# Altium PCB PCB1.PcbDoc
Units mil, origin at the board's own origin, x right, y up, seen from the top; angles counter-clockwise.
Board outline 2240 x 3040 mil, 2 copper layers (Top Layer, Bottom Layer); 15 components, 12 nets, 105 pads, 0 vias.
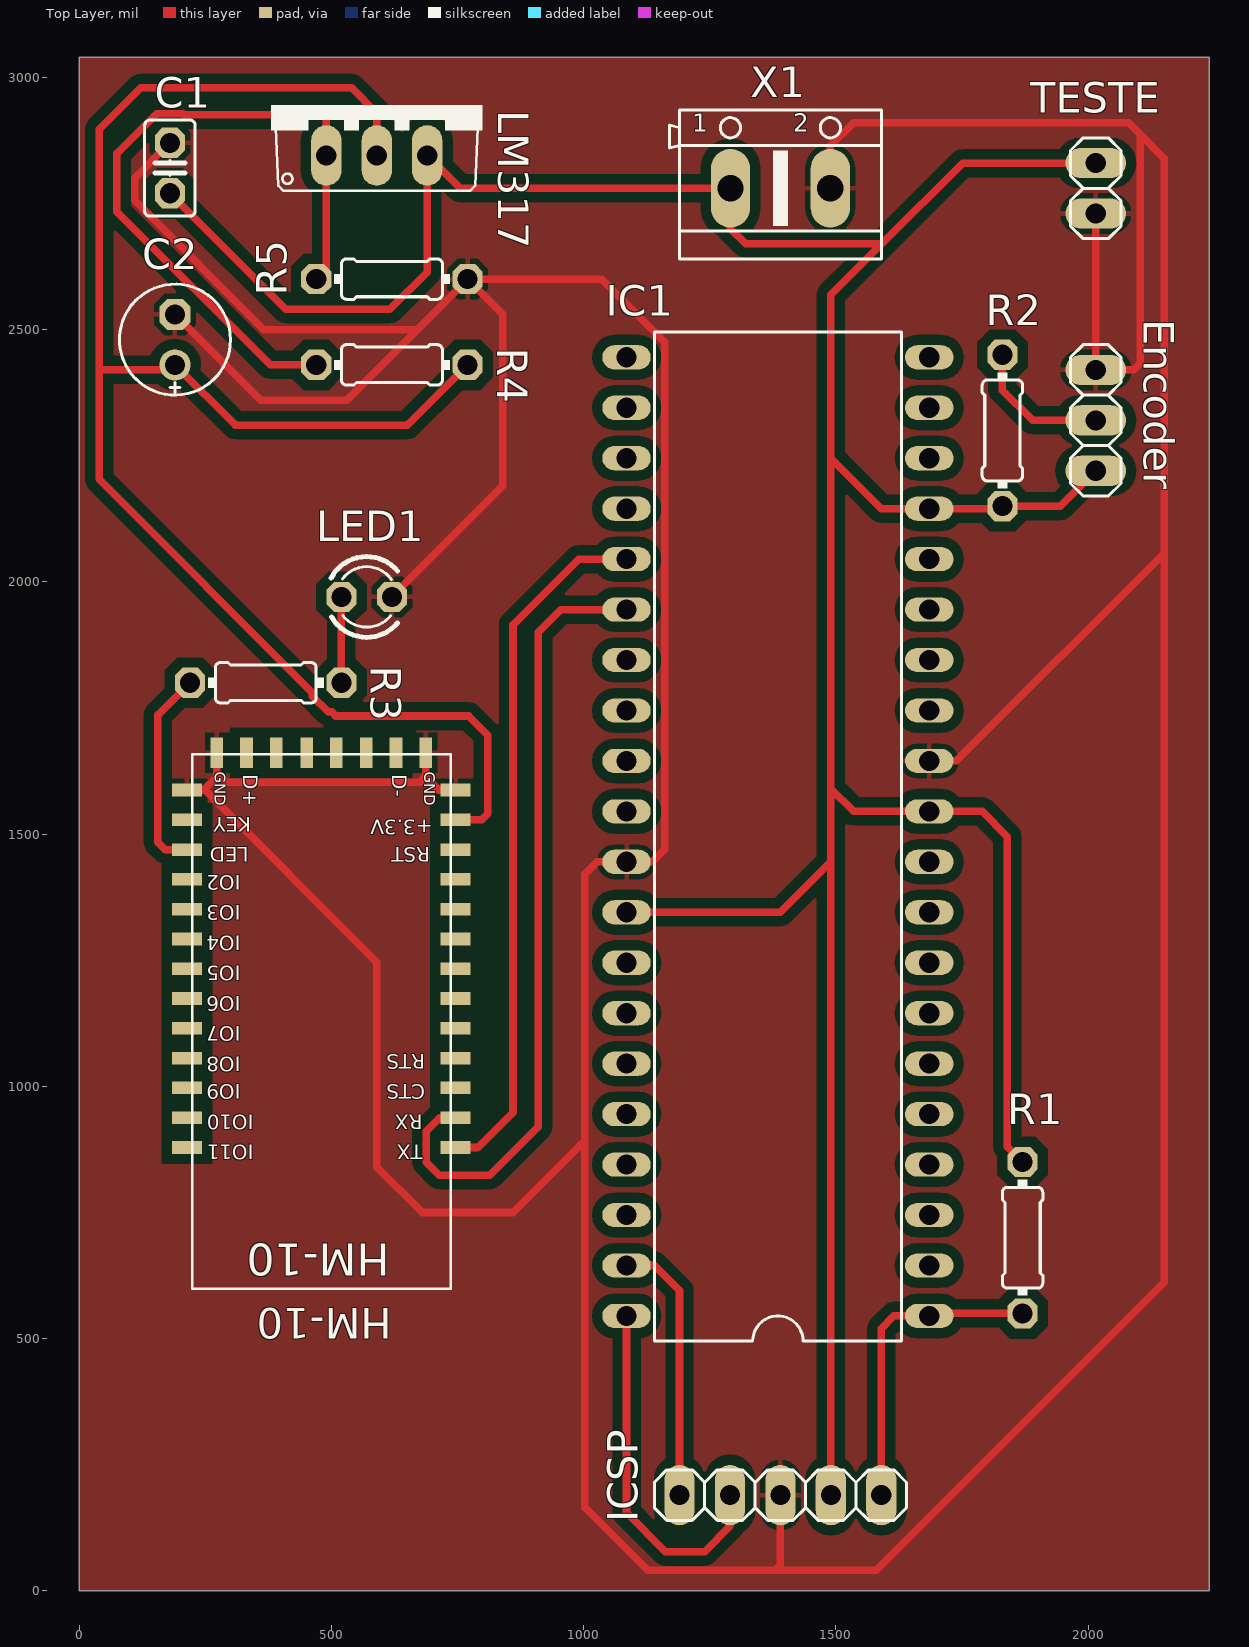
[diagram p0: Top Layer view]
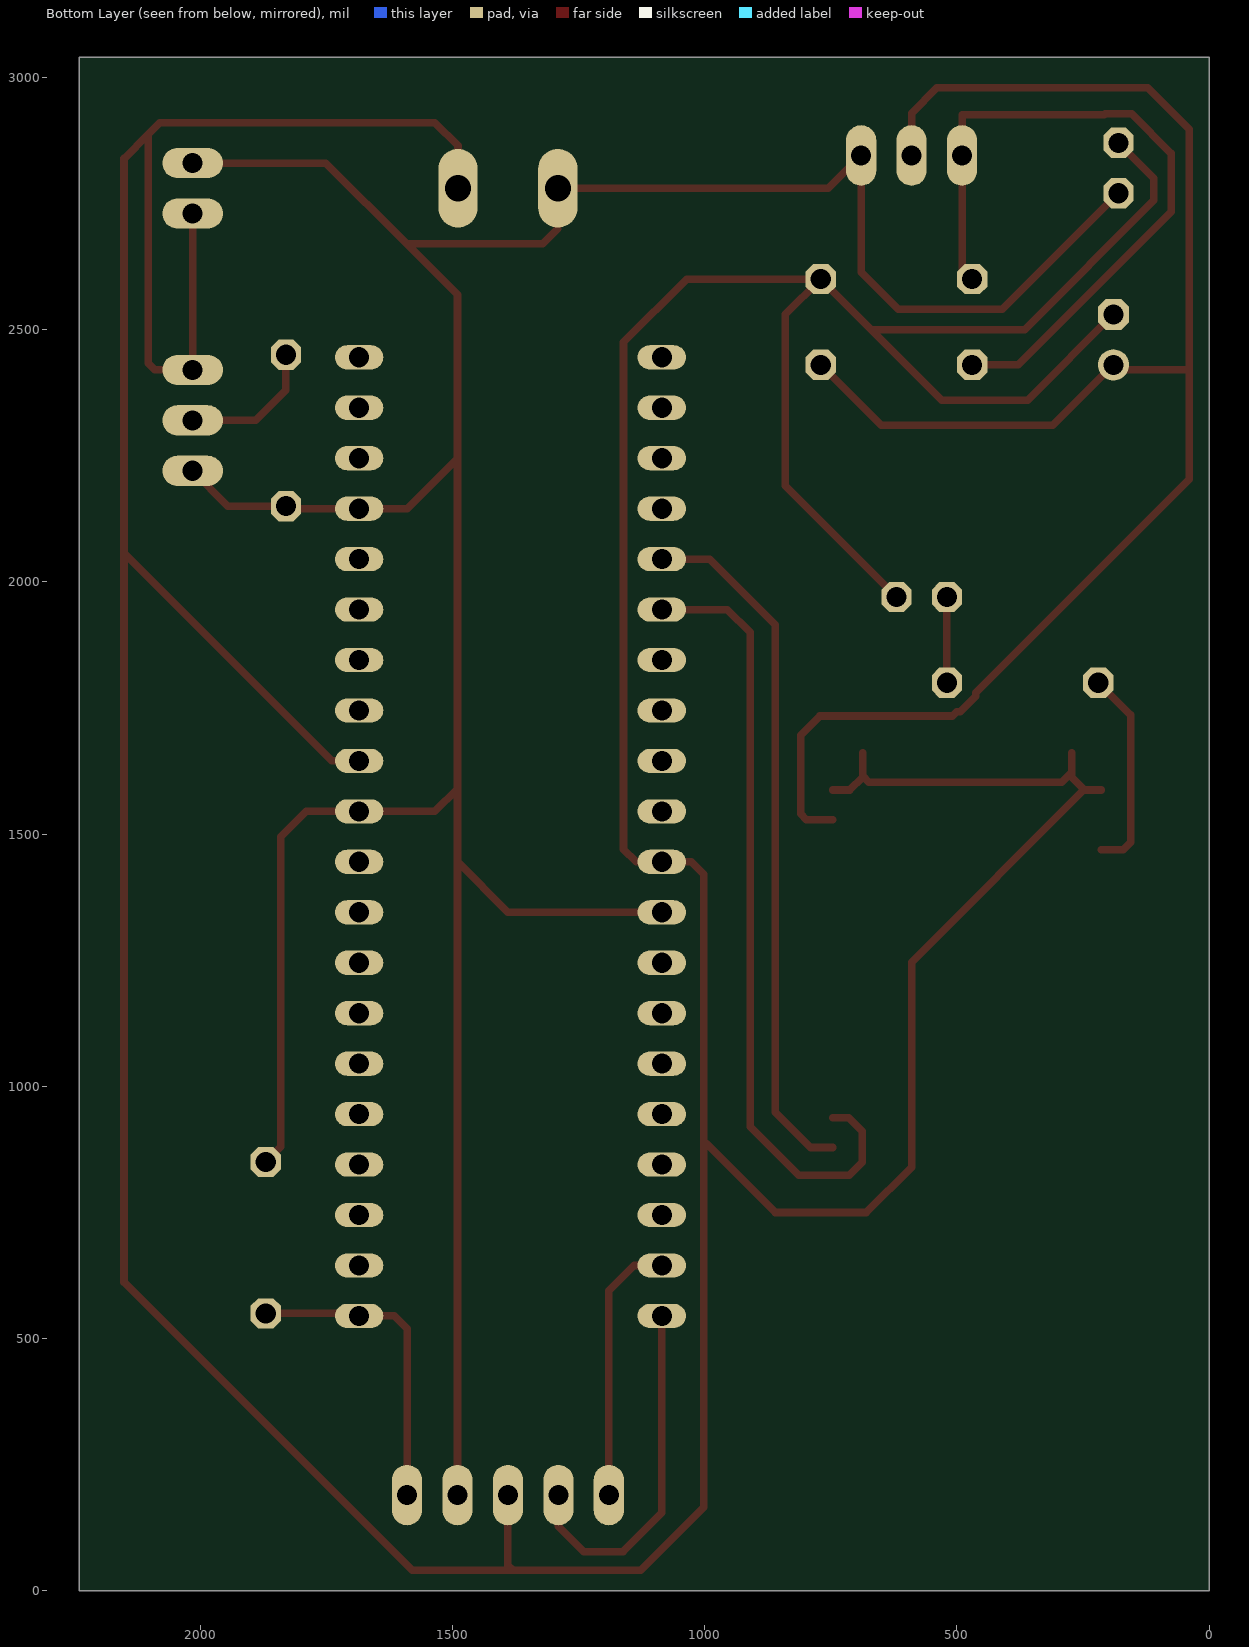
[diagram p1: Bottom Layer view, seen from below]

## Layer stack, top to bottom
Top Solder: solder mask 0.4, Solder Resist, Dk 3.5
Top Layer: signal copper 1.4
Dielectric 1: dielectric 12.6, FR-4, Dk 4.8
Bottom Layer: signal copper 1.4
Bottom Solder: solder mask 0.4, Solder Resist, Dk 3.5

## Board outline
0,0 0,3040 2240,3040 2240,0

## Design rules (kind name [scope] priority, off if disabled: settings)
Clearance [All] p1: gap=20
PolygonConnect [All] p1: connectstyle=Relief reliefconductorwidth=10 reliefentries=4 polygonreliefangle="90 Angle" airgapwidth=10
RoutingLayers [All] p1: top layer_v5=TRUE bottom layer_v5=FALSE
RoutingVias [All] p1: holewidth=28 width=50 viastyle="Through Hole" minholewidth=28 minwidth=50 maxholewidth=28 maxwidth=50
SolderMaskExpansion [All] p1: expansion=4
UnpouredPolygon [All] p1: allowunpoured=FALSE
Width [All] p1: maxlimit=20 minlimit=15 preferedwidth=15
28 further rules are at their usual default settings.

## Components (designator, comment, footprint, x,y, rotation, side; value= is the part's Value field where it differs from the comment)
C1 "100nF" C025-025X050 180,2820 r90 top
C2 "1uF" E2,5-6E 190,2480 r90 top
Encoder "PIN HEADER" 1X03 2015,2320 r90 top
HM-10 "HM Bluetooth module use TI CC2540 or CC2541, Master and slave roles in one, transmission version and remote control version and PIO state acquisition functions in one, Support the AT command modify module parameters, Convenient and flexible." HM-10_BOARD 480,1270 r180 top
IC1 "PIC18F4550" DIL40 1385,1495 r90 top
ICSP "PIN HEADER" 1X05 1390,190 r180 top
LED1 "LED   OSRAM: - CHIPLED LG R971, LG N971, LY N971, LG Q971, LY Q971, LO R971, LY R971 LH N974, LH R974 LS Q976, LO Q976, LY Q976 LO Q996 - Hyper CHIPLED LW Q18S LB Q993, LB Q99A, LB R99A - SideLED LS A670, LO A670, LY A670, LG A670, LP A670 LB A673, LV A673, LT A673, LW A673 LH A674 LY A675 LS A676, LA A676, LO A676, LY A676, LW A676 LS A679, LY A679, LG A679 -  Hyper Micro SIDELED® LS Y876, LA Y876, LO Y876, LY Y876 LT Y87S - SmartLED LW L88C, LW L88S LB L89C, LB L89S, LG L890 LS L89K, LO L89K, LY L89K LS L896, LA L896, LO L896, LY L896 - TOPLED LS T670, LO T670, LY T670, LG T670, LP T670 LSG T670, LSP T670, LSY T670, LOP T670, LYG T670 LG T671, LOG T671, LSG T671 LB T673, LV T673, LT T673, LW T673 LH T674 LS T676, LA T676, LO T676, LY T676, LB T676, LH T676, LSB T676, LW T676 LB T67C, LV T67C, LT T67C, LS T67K, LO T67K, LY T67K, LW E67C LS E67B, LA E67B, LO E67B, LY E67B, LB E67C, LV E67C, LT E67C LW T67C LS T679, LY T679, LG T679 LS T770, LO T770, LY T770, LG T770, LP T770 LB T773, LV T773, LT T773, LW T773 LH T774 LS E675, LA E675, LY E675, LS T675 LS T776, LA T776, LO T776, LY T776, LB T776 LHGB T686 LT T68C, LB T68C - Hyper Mini TOPLED® LB M676 - Mini TOPLED Santana® LG M470 LS M47K, LO M47K, LY M47K    Source: http://www.osram.convergy.de   LUXEON: - LUMILED® LXK2-PW12-R00, LXK2-PW12-S00, LXK2-PW14-U00, LXK2-PW14-V00 LXK2-PM12-R00, LXK2-PM12-S00, LXK2-PM14-U00 LXK2-PE12-Q00, LXK2-PE12-R00, LXK2-PE12-S00, LXK2-PE14-T00, LXK2-PE14-U00 LXK2-PB12-K00, LXK2-PB12-L00, LXK2-PB12-M00, LXK2-PB14-N00, LXK2-PB14-P00, LXK2-PB14-Q00 LXK2-PR12-L00, LXK2-PR12-M00, LXK2-PR14-Q00, LXK2-PR14-R00 LXK2-PD12-Q00, LXK2-PD12-R00, LXK2-PD12-S00 LXK2-PH12-R00, LXK2-PH12-S00 LXK2-PL12-P00, LXK2-PL12-Q00, LXK2-PL12-R00    Source: www.luxeon.com   KINGBRIGHT:   KA-3528ASYC Source: www.kingbright.com" LED3MM 570,1970 r0 top
LM317 "Positive VOLTAGE REGULATOR   Source: http://cache.national.com/ds/LM/LM78L05.pdf http://www.fairchildsemi.com/ds/LM/LM7805.pdf" TO220V 590,2945 r0 top
R1 "10k" 0204/7 1870,700 r270 top
R2 "10k" 0204/7 1830,2300 r90 top
R3 "330R" 0204/7 370,1800 r0 top
R4 "330R" 0204/7 620,2430 r0 top
R5 "330R" 0204/7 620,2600 r180 top
TESTE "PIN HEADER" 1X02 2015,2780 r270 top
X1 "CONNECTOR" AK500/2 1390,2780 r0 top

## Footprints (in the part's own frame and the unit in brackets; to place one, negate y for a bottom-side part, rotate by r counter-clockwise, add the part's x,y. Pads: shape width x height; smd on the part's side, far side on the other; paste and mask are expansions set on the pad)
1X02 [mil]
  oval 60x120 hole 40: 1(-50,0) 2(50,0)
  silkscreen extent -100,-50 100,50
1X03 [mil]
  oval 60x120 hole 40: 1(-100,0) 2(0,0) 3(100,0)
  silkscreen extent -150,-50 150,50
1X05 [mil]
  oval 60x120 hole 40: 1(-200,0) 2(-100,0) 3(0,0) 4(100,0) 5(200,0)
  silkscreen extent -250,-50 250,50
0204/7 [mil]
  oct 60x60 hole 40 mask+4: 1(-150,0) 2(150,0)
  silkscreen extent -115,-40 115,40
AK500/2 [mil]
  oval 78x156 hole 52: 1(-99,0) 2(99,0)
  silkscreen extent -220,-140 200,155
C025-025X050 [mil]
  oct 60x60 hole 40 mask+4: 1(-50,0) 2(50,0)
  silkscreen extent -95,-50 95,50
DIL40 [mil]
  oval 48x96 hole 40: 1(-950,-300) 2(-850,-300) 3(-750,-300) 4(-650,-300) 5(-550,-300) 6(-450,-300) 7(-350,-300) 8(-250,-300) 9(-150,-300) 10(-50,-300) 11(50,-300) 12(150,-300) 13(250,-300) 14(350,-300) 15(450,-300) 16(550,-300) 17(650,-300) 18(750,-300) 19(850,-300) 20(950,-300) 21(950,300) 22(850,300) 23(750,300) 24(650,300) 25(550,300) 26(450,300) 27(350,300) 28(250,300) 29(150,300) 30(50,300) 31(-50,300) 32(-150,300) 33(-250,300) 34(-350,300) 35(-450,300) 36(-550,300) 37(-650,300) 38(-750,300) 39(-850,300) 40(-950,300)
  silkscreen extent -1000,-245 1000,245
E2,5-6E [mil]
  round 62 hole 40: +(-50,0)
  oct 62x62 hole 40: -(50,0)
  silkscreen extent -110,-110 110,110
HM-10_BOARD [mil]
  rect 60x25 smd: 1(-266.14,391.24) 2(-266.14,332.19) 3(-266.14,273.13) 4(-266.14,214.08) 5(-266.14,155.02) 6(-266.14,95.97) 8(-266.14,-22.15) 9(-266.14,-81.2) 10(-266.14,-140.26) 11(-266.14,-199.31) 12(-266.14,-258.37) 13(-266.14,-317.42) 22(266.14,-317.42) 23(266.14,-258.37) 24(266.14,-199.31) 25(266.14,-140.26) 26(266.14,-81.2) 27(266.14,-22.15) 28(266.14,36.91) 29(266.14,95.97) 30(266.14,155.02) 31(266.14,214.08) 32(266.14,273.13) 33(266.14,332.19) 34(266.14,391.24) $7(-266.14,36.91)
  rect 25x60 smd: 14(-207.08,-391.24) 15(-148.03,-391.24) 16(-88.97,-391.24) 17(-29.92,-391.24) 18(29.14,-391.24) 19(89.14,-391.24) 20(148.14,-391.24) 21(207.14,-391.24)
  silkscreen extent -256,-388 256,671, body extent -256,-387 256,672, height 95
LED3MM [mil]
  oct 60x60 hole 40 mask+4: A(-50,0) K(50,0)
  silkscreen extent -71,-80 61,80
TO220V [mil]
  oval 60x120 hole 40: 1(-100,-100) 2(0,-100) 3(100,-100)
  silkscreen extent -210,-170 210,0

## Part data
C1: library part C-EU025-025X050
C2: library part CPOL-EUE2,5-6E
Encoder: library part PINHD-1X3
HM-10: library part HM-10-BOARD
IC1: library part PIC18F4*_40
ICSP: library part PINHD-1X5
LED1: library part LED3MM
LM317: library part 78*TV
R1 R2 R3 R4 R5: library part R-EU_0204/7
TESTE: library part PINHD-1X2
X1: library part AK500/2

## Nets (pads, with @x,y where several pads share a name; then routed paths per layer and width w, separated by ;. In a path a pad name is that pad's centre, name@x,y a point inside that pad or via, vN(x,y) a via of type N, cw(c..) or ccw(c..) an arc to the next point about the centre after c; other vN are vias at no path point)
3.3V: C2.+ HM-10.12 LM317.2 R4.2 | length 3425
  Top Layer w15: LM317.2 590,2929 540,2979 122,2979 40,2897 40,2420 ; HM-10.12 798.37,1528.37 810,1540 810,1696 772,1734 509,1734 500.5,1742.5 493.61,1742.5 462.5,1773.61 462.5,1780.5 40,2203 40,2420 ; R4.2 650,2310 310,2310 C2.+ 180,2420 40,2420
DATA: C1.1 Encoder.1 IC1.11 IC1.17 IC1.32 ICSP.2 LM317.3 R1.1 R2.1 TESTE.1 X1.1 | length 6990.1
  Top Layer w15: C1.1 410,2540 616,2540 690,2614 LM317.3 755,2780 X1.1 1291,2700 1321,2670 1591,2670 ; IC1.32 1390,1345 1490,1445 ; ICSP.2 1490,1445 ; R1.1 1840,880 1840,1495 1790,1545 IC1.11 1535,1545 1490,1590 ; Encoder.1 1945,2150 R2.1 1825,2145 IC1.17 1590,2145 1490,2245 ; TESTE.1 1751,2830 1591,2670 ; 1490,1445 1490,1590 ; 1490,1590 1490,2245 ; 1490,2245 1490,2569 1591,2670
GND: C1.2 C2.- Encoder.3 HM-10.13 HM-10.14 HM-10.21 HM-10.22 IC1.12 IC1.31 ICSP.3 LED1.K R5.1 TESTE.2 X1.2 | length 13349.1
  Top Layer w15: C1.2 110,2800 110,2756.11 366.11,2500 670,2500 ; C2.- 360,2360 530,2360 670,2500 ; HM-10.22 247.42,1587.42 ; HM-10.21 272.86,1622.14 ; LED1.K 840,2190 840,2530 R5.1 ; HM-10.14 687.08,1615.34 ; HM-10.13 712.58,1587.42 687.08,1612.92 687.08,1615.34 ; 996,886 860,750 680,750 590,840 590,1246 248.58,1587.42 247.42,1587.42 ; ICSP.3 1390,51 1380,41 ; X1.2 1489,2864 1535,2910 2080,2910 2103,2887 ; IC1.12 1739,1645 2151,2057 ; TESTE.2 Encoder.3 2090,2420 2103,2433 2103,2887 ; 247.42,1587.42 272.86,1612.86 272.86,1622.14 ; 272.86,1622.14 292,1603 674.74,1603 687.08,1615.34 ; 670,2500 R5.1 ; R5.1 1036,2600 1161,2475 1161,1470 1136,1445 IC1.31 1027,1445 1002,1420 1002,166 1127,41 1380,41 ; 1380,41 1580,41 2151,612 2151,2057 ; 2103,2887 2151,2839 2151,2057
MCLR: IC1.1 ICSP.1 R1.2 | length 622.4
  Top Layer w15: ICSP.1 1590,520 1615,545 IC1.1 1690,550 R1.2
NetEncoder_2: Encoder.2 R2.2 | length 279.9
  Top Layer w15: R2.2 1830,2380 1890,2320 Encoder.2
NetHM-10_24: HM-10.24 R3.1 | length 406.5
  Top Layer w15: HM-10.24 170.69,1469.31 156,1484 156,1736 R3.1
NetLED1_A: LED1.A R3.2 | length 170
  Top Layer w15: R3.2 LED1.A
NetLM317_1: LM317.1 R4.1 R5.2 | length 1418.4
  Top Layer w15: R4.1 378.77,2430 75,2733.77 75,2848.89 153.61,2927.5 206.39,2927.5 207.89,2926 490,2926 LM317.1 490,2620 R5.2
PGC: IC1.39 ICSP.5 | length 530.7
  Top Layer w15: IC1.39 1140,645 1190,595 ICSP.5
PGD: IC1.40 ICSP.4 | length 709.6
  Top Layer w15: IC1.40 1085,155 1162,78 1240,78 1290,128 ICSP.4
RX: HM-10.2 IC1.26 | length 1576.3
  Top Layer w15: HM-10.2 715,937.81 688,910.81 688,850 714,824 814,824 910,920 910,1900 955,1945 IC1.26
TX: HM-10.1 IC1.25 | length 1387.9
  Top Layer w15: HM-10.1 790,878.76 860,948.76 860,1915 990,2045 IC1.25
pads on no net: HM-10.3 HM-10.4 HM-10.5 HM-10.6 HM-10.8 HM-10.9 HM-10.10 HM-10.11 HM-10.15 HM-10.16 HM-10.17 HM-10.18 HM-10.19 HM-10.20 HM-10.23 HM-10.25 HM-10.26 HM-10.27 HM-10.28 HM-10.29 HM-10.30 HM-10.31 HM-10.32 HM-10.33 HM-10.34 HM-10.$7 IC1.2 IC1.3 IC1.4 IC1.5 IC1.6 IC1.7 IC1.8 IC1.9 IC1.10 IC1.13 IC1.14 IC1.15 IC1.16 IC1.18 IC1.19 IC1.20 IC1.21 IC1.22 IC1.23 IC1.24 IC1.27 IC1.28 IC1.29 IC1.30 IC1.33 IC1.34 IC1.35 IC1.36 IC1.37 IC1.38

## Polygon pours and split planes (outlines as drawn)
GND on Top Layer "GND" (solid, remove dead copper, pour order 2): 0,0 2240,0 2240,3040 0,3040

## Silkscreen, mask and mechanical layers (free items; w line width, h text height)
Mechanical 1:
  the board outline again, w10

## Text inside footprints (layer, text, board x,y; h text height)
HM-10: Top Overlay "TX" at 680.86,893.76 h49.6 r180; Top Overlay "RX" at 680.86,953.76 h49.6 r180; Top Overlay "CTS" at 685.86,1013.76 h49.6 r180; Top Overlay "RTS" at 685.86,1073.76 h49.6 r180; Top Overlay "RST" at 695.86,1483.76 h49.6 r180; Top Overlay "+3.3V" at 700.86,1538.76 h49.6 r180; Top Overlay "GND" at 675.86,1623.76 h37.2 r270; Top Overlay "D-" at 610.86,1618.76 h49.6 r270; Top Overlay "D+" at 315.86,1618.76 h49.6 r270; Top Overlay "GND" at 260.86,1623.76 h37.2 r270; Top Overlay "KEY" at 340.86,1543.76 h49.6 r180; Top Overlay "LED" at 335.86,1483.76 h49.6 r180; Top Overlay "IO2" at 320.86,1428.76 h49.6 r180; Top Overlay "IO3" at 320.86,1368.76 h49.6 r180; Top Overlay "IO4" at 320.86,1308.76 h49.6 r180; Top Overlay "IO5" at 320.86,1248.76 h49.6 r180; Top Overlay "IO6" at 320.86,1188.76 h49.6 r180; Top Overlay "IO7" at 320.86,1128.76 h49.6 r180; Top Overlay "IO8" at 320.86,1068.76 h49.6 r180; Top Overlay "IO9" at 320.86,1013.76 h49.6 r180; Top Overlay "IO10" at 345.86,953.76 h49.6 r180; Top Overlay "IO11" at 345.86,893.76 h49.6 r180
LM317: Mechanical 16 "3" at 665,2820 h77.5; Mechanical 16 "2" at 565,2820 h77.5; Mechanical 16 "1" at 465,2820 h77.5
X1: Top Overlay "1" at 1215,2880 h60.45; Top Overlay "2" at 1415,2880 h60.45